# EAGLE board sensorboard final2 (EAGLE 9.3.0)
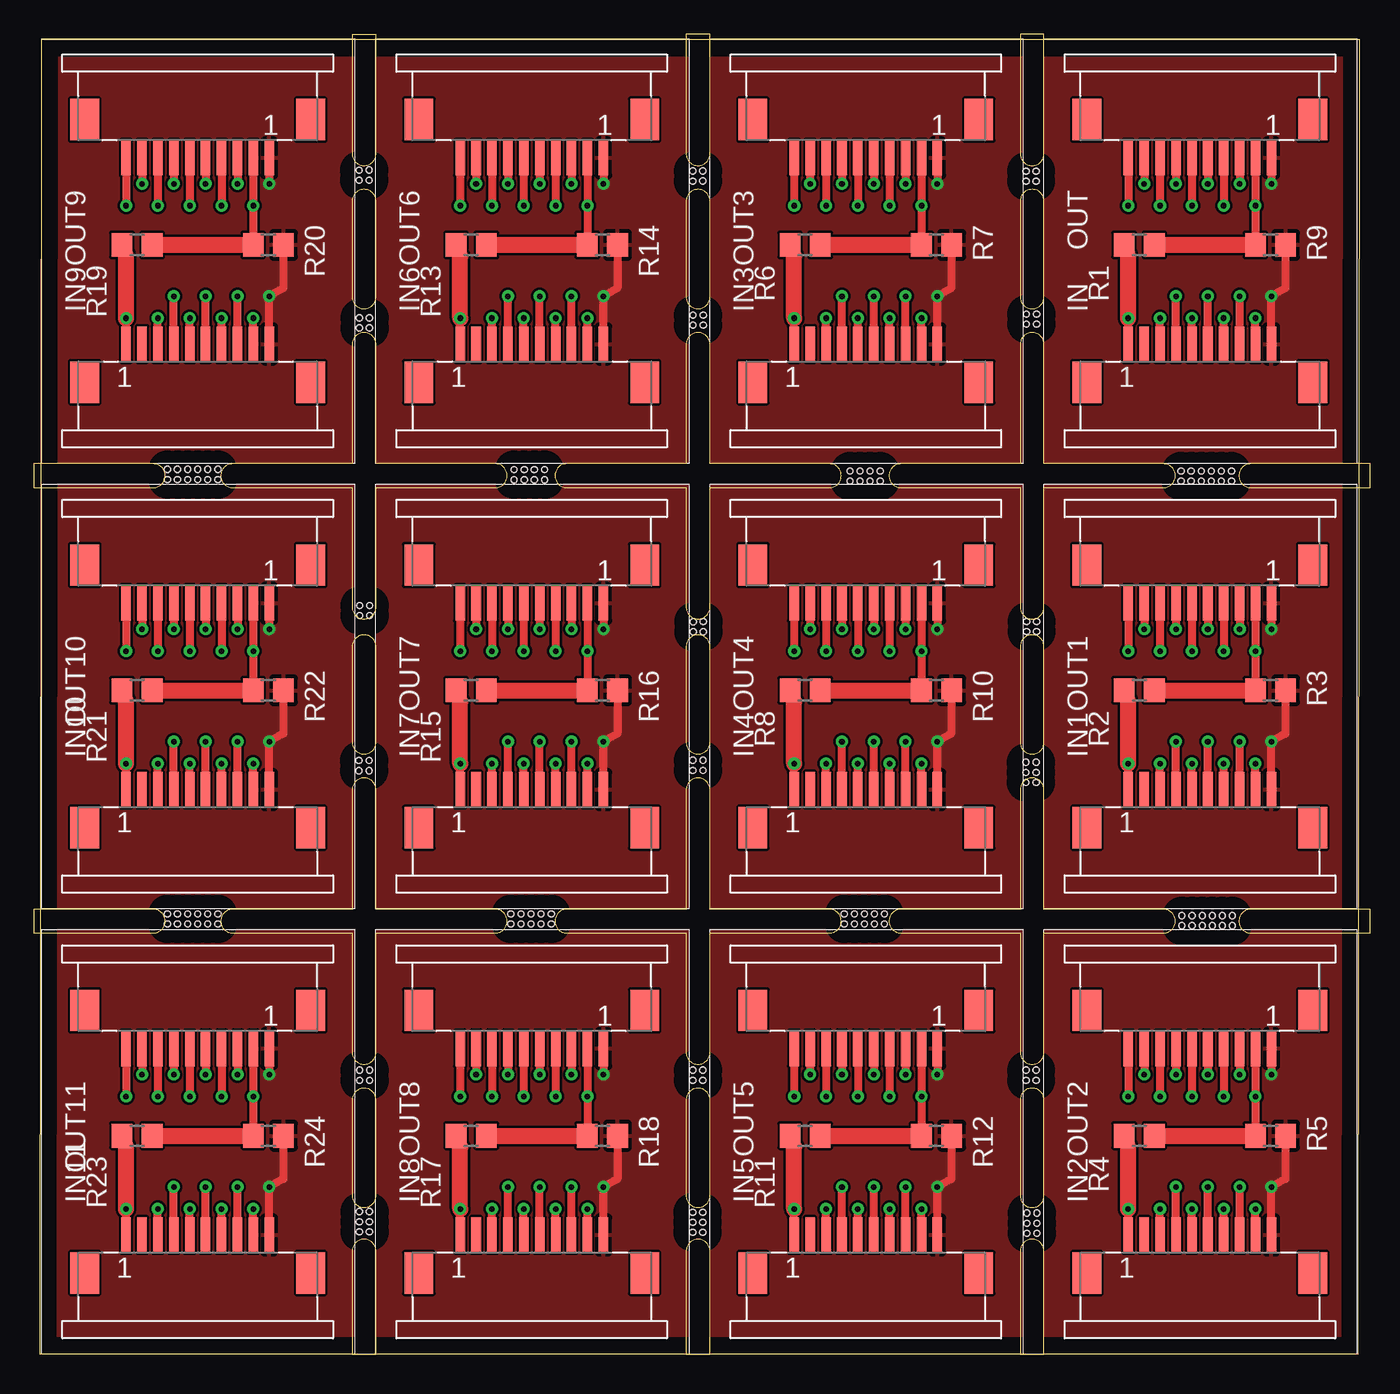
[diagram p0: board, top side]
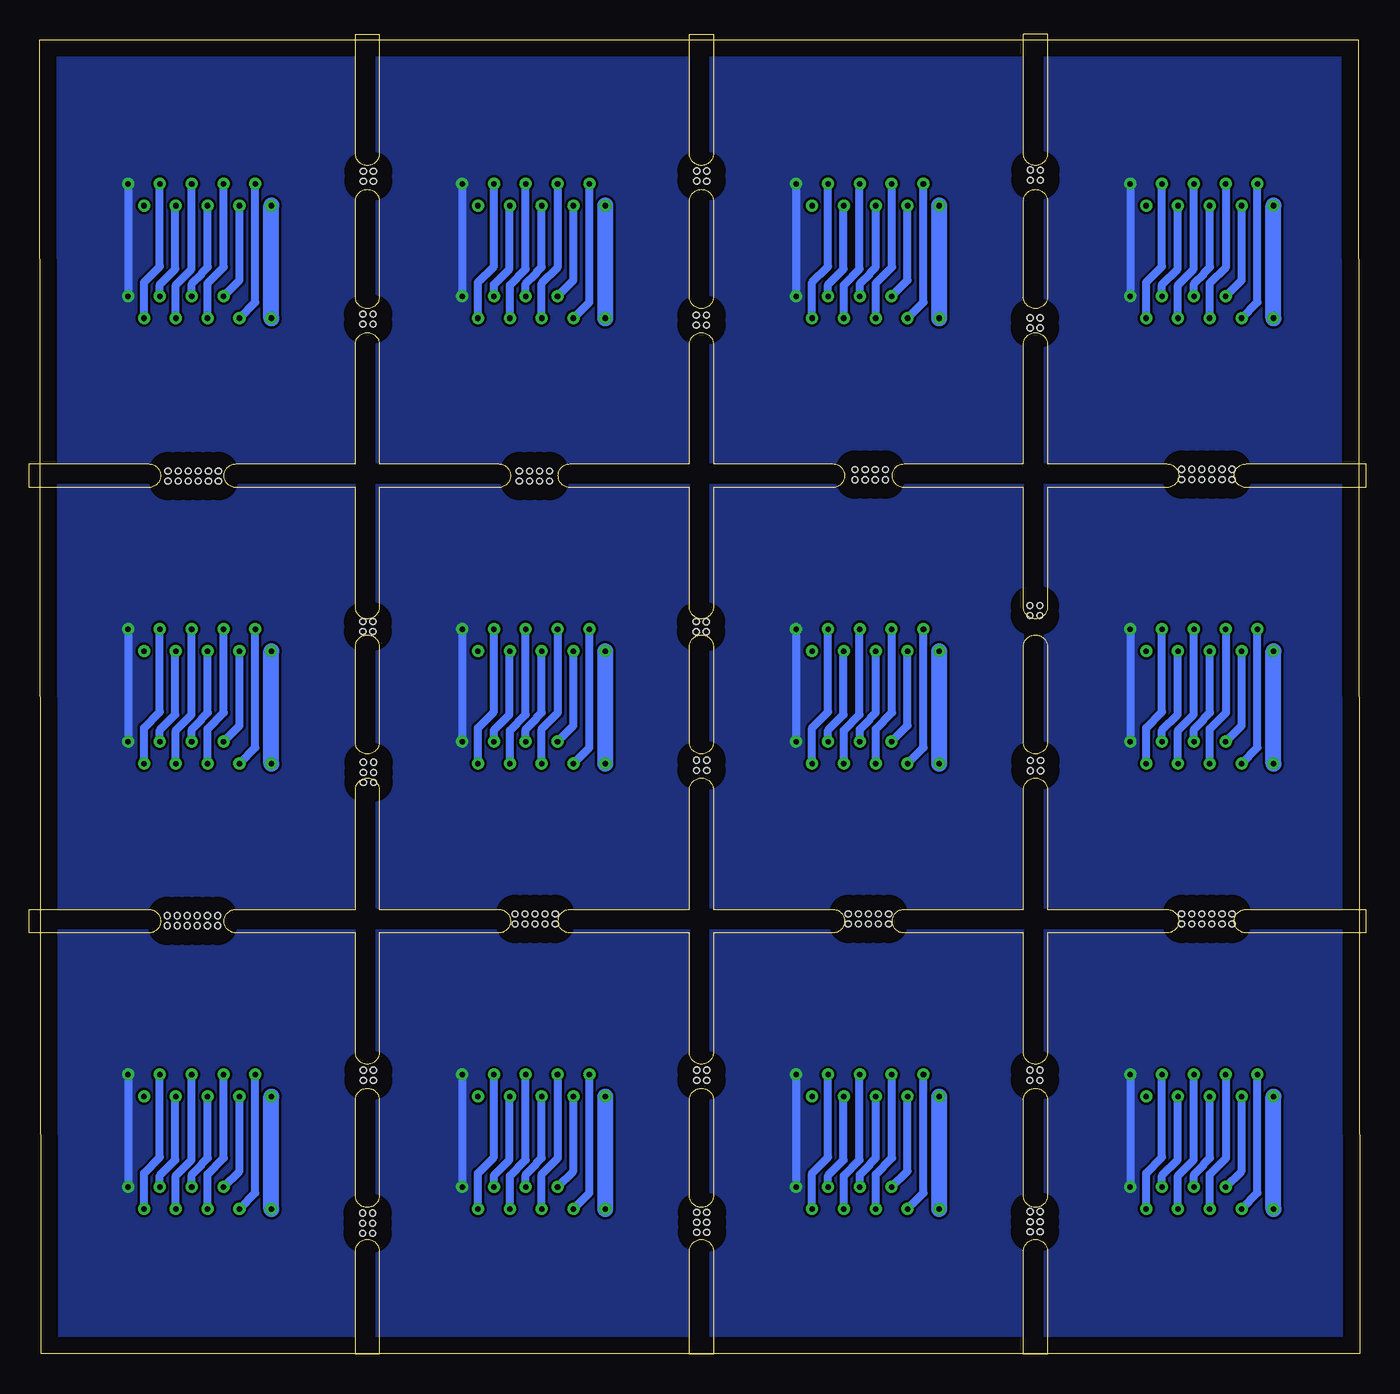
[diagram p1: board, bottom side, seen from below]

Size 82.98 x 82.61 mm. Coordinates in mm from the lower left corner, seen from the top.
Outline: 0,0 82.9,0 82.98,82.61 0.08,82.61 0,0
Copper layers (1*16): Top 0.035mm / dielectric 1.5mm / Bottom 0.035mm
Design rules "default": minimum track width 6mil, minimum drill 0.35mm, track to track 6mil, track to pad 6mil, pad to pad 6mil, via to via 6mil, smd to smd 6mil, copper to edge 40mil, drill to drill 6mil, minimum pad ring 10mil, minimum via ring 8mil, stop-mask expansion 4mil, vias tented up to drill 0mil, thermal gap 10mil
Holes 0.35 mm at 8.02,55.6 9.29,55.6 10.56,55.6 8.66,55.6 9.93,55.6 8.02,54.97 8.66,54.97 9.29,54.97 9.93,54.97 10.56,54.97 11.2,54.97 11.2,55.6 8.02,27.66 9.29,27.66 10.56,27.66 8.66,27.66 9.93,27.66 8.02,27.03 8.66,27.03 9.29,27.03 9.93,27.03 10.56,27.03 11.2,27.03 11.2,27.66 20.09,8.31 20.09,7.67 20.09,8.94 20.72,7.67 20.72,8.31 20.72,8.94 41.04,8.27 41.04,7.64 41.04,8.91 41.68,7.64 41.68,8.27 41.68,8.91 62.06,8.22 62.06,7.58 62.06,8.85 62.69,7.58 62.69,8.22 62.69,8.85 62.01,17.83 62.01,17.2 62.64,17.2 62.64,17.84 41.05,17.83 41.05,17.2 41.68,17.2 41.68,17.84 20.1,17.83 20.1,17.2 20.73,17.2 20.73,17.84 29.61,27.66 30.88,27.66 32.15,27.66 30.25,27.66 31.52,27.66 29.61,27.03 30.25,27.03 30.88,27.03 31.52,27.03 32.15,27.03 51.2,27.66 52.47,27.66 50.57,27.66 51.84,27.66 50.57,27.03 51.2,27.03 51.84,27.03 52.47,27.03 53.11,27.03 53.11,27.66 71.8,27.55 73.07,27.55 74.34,27.55 72.44,27.55 73.71,27.55 71.8,26.91 72.44,26.91 73.07,26.91 73.71,26.91 74.34,26.91 74.98,26.91 74.98,27.55 71.74,55.5 73.01,55.5 74.28,55.5 72.38,55.5 73.65,55.5 71.74,54.86 72.38,54.86 73.01,54.86 73.65,54.86 74.28,54.86 74.92,54.86 74.92,55.5 51.56,55.5 52.83,55.5 50.93,55.5 52.2,55.5 50.93,54.86 51.56,54.86 52.2,54.86 52.83,54.86 20.06,37.3 20.06,36.66 20.7,36.66 20.7,37.3 20.1,47.04 20.1,46.41 20.73,46.41 20.73,47.05 41.05,37.32 41.05,36.68 41.69,36.68 41.69,37.32 41.08,46.03 41.08,45.39 41.71,45.4 41.71,46.03 62,36.55 62,35.92 62,37.19 62.63,35.92 62.63,36.55 62.63,37.19 62.04,46.04 62.04,45.4 62.67,45.4 62.67,46.04 62.03,65.36 62.03,64.72 62.66,64.72 62.66,65.36 62.01,74.35 62.01,73.71 62.64,73.72 62.64,74.35 41.07,65.3 41.07,64.66 41.71,64.66 41.71,65.3 41.05,74.36 41.05,73.73 41.68,73.73 41.68,74.37 20.09,65.13 20.09,64.49 20.72,64.49 20.72,65.13 20.07,74.42 20.07,73.78 20.7,73.79 20.7,74.42 30.46,55.59 31.73,55.59 29.82,55.59 31.09,55.59 29.82,54.95 30.46,54.95 31.09,54.95 31.73,54.95
Milling: 151 lines

## Footprints (pad centres in the part's own frame; a part is rotated, then mirrored left to right if it is on the bottom)
68611014422 = smd 0.6 x 2.2: 1 -4.5,2.4; 2 -3.5,2.4; 3 -2.5,2.4; 4 -1.5,2.4; 5 -0.5,2.4; 6 0.5,2.4; 7 1.5,2.4; 8 2.5,2.4; 9 3.5,2.4; 10 4.5,2.4 | smd 1.8 x 2.6: Z1 -7.1,0; Z2 7.1,0
R0805 = smd 1.3 x 1.5: 1 -0.95,0; 2 0.95,0

## Placement (x,y rotation side)
IN  analog  [68611014422]  72.93,61.08 0 top
IN1  analog  [68611014422]  72.93,33.08 0 top
IN2  analog  [68611014422]  72.93,5.08 0 top
IN3  analog  [68611014422]  51.93,61.08 0 top
IN4  analog  [68611014422]  51.93,33.08 0 top
IN5  analog  [68611014422]  51.93,5.08 0 top
IN6  analog  [68611014422]  30.93,61.08 0 top
IN7  analog  [68611014422]  30.93,33.08 0 top
IN8  analog  [68611014422]  30.93,5.08 0 top
IN9  analog  [68611014422]  9.93,61.08 0 top
IN10  analog  [68611014422]  9.93,33.08 0 top
IN11  analog  [68611014422]  9.93,5.08 0 top
OUT  analog  [68611014422]  72.93,77.59 180 top
OUT1  analog  [68611014422]  72.93,49.59 180 top
OUT2  analog  [68611014422]  72.93,21.59 180 top
OUT3  analog  [68611014422]  51.93,77.59 180 top
OUT4  analog  [68611014422]  51.93,49.59 180 top
OUT5  analog  [68611014422]  51.93,21.59 180 top
OUT6  analog  [68611014422]  30.93,77.59 180 top
OUT7  analog  [68611014422]  30.93,49.59 180 top
OUT8  analog  [68611014422]  30.93,21.59 180 top
OUT9  analog  [68611014422]  9.93,77.59 180 top
OUT10  analog  [68611014422]  9.93,49.59 180 top
OUT11  analog  [68611014422]  9.93,21.59 180 top
R1  NTC  [R0805]  69.12,69.72 180 top
R2  NTC  [R0805]  69.12,41.72 180 top
R3  10K  [R0805]  77.37,41.72 180 top
R4  NTC  [R0805]  69.12,13.72 180 top
R5  10K  [R0805]  77.37,13.72 180 top
R6  NTC  [R0805]  48.12,69.72 180 top
R7  10K  [R0805]  56.37,69.72 180 top
R8  NTC  [R0805]  48.12,41.72 180 top
R9  10K  [R0805]  77.37,69.72 180 top
R10  10K  [R0805]  56.37,41.72 180 top
R11  NTC  [R0805]  48.12,13.72 180 top
R12  10K  [R0805]  56.37,13.72 180 top
R13  NTC  [R0805]  27.12,69.72 180 top
R14  10K  [R0805]  35.37,69.72 180 top
R15  NTC  [R0805]  27.12,41.72 180 top
R16  10K  [R0805]  35.37,41.72 180 top
R17  NTC  [R0805]  27.12,13.72 180 top
R18  10K  [R0805]  35.37,13.72 180 top
R19  NTC  [R0805]  6.12,69.72 180 top
R20  10K  [R0805]  14.37,69.72 180 top
R21  NTC  [R0805]  6.12,41.72 180 top
R22  10K  [R0805]  14.37,41.72 180 top
R23  NTC  [R0805]  6.12,13.72 180 top
R24  10K  [R0805]  14.37,13.72 180 top

## Library data of the parts
IN IN1-IN11 OUT OUT1-OUT11 = Wurth_Elektronik_Electromechanic_FPC_Connectors_&_Flat_Flexible_Cable_rev18c
R1-R24 = rcl; SPICEPREFIX: R

## Nets
+5V: IN.1 OUT.10 R1.2
+5V1: IN1.1 OUT1.10 R2.2
+5V2: IN2.1 OUT2.10 R4.2
+5V3: IN3.1 OUT3.10 R6.2
+5V4: IN4.1 OUT4.10 R8.2
+5V5: IN5.1 OUT5.10 R11.2
+5V6: IN6.1 OUT6.10 R13.2
+5V7: IN7.1 OUT7.10 R15.2
+5V8: IN8.1 OUT8.10 R17.2
+5V9: IN9.1 OUT9.10 R19.2
+5V10: IN10.1 OUT10.10 R21.2
+5V11: IN11.1 OUT11.10 R23.2
AD1: IN1.3 OUT1.9
AD2: IN.3 OUT.9
AD3: IN.4 OUT.8
AD4: IN.5 OUT.7
AD5: IN.6 OUT.6
AD6: IN.7 OUT.5
AD7: IN.8 OUT.4
AD8: IN.9 OUT.3
AD9: IN1.4 OUT1.8
AD10: IN1.5 OUT1.7
AD11: IN1.9 OUT1.3
AD12: IN1.8 OUT1.4
AD13: IN1.7 OUT1.5
AD14: IN1.6 OUT1.6
AD15: IN2.3 OUT2.9
AD16: IN2.4 OUT2.8
AD17: IN2.5 OUT2.7
AD18: IN2.9 OUT2.3
AD19: IN2.8 OUT2.4
AD20: IN2.7 OUT2.5
AD21: IN2.6 OUT2.6
AD22: IN3.3 OUT3.9
AD23: IN3.4 OUT3.8
AD24: IN3.5 OUT3.7
AD25: IN3.9 OUT3.3
AD26: IN3.8 OUT3.4
AD27: IN3.7 OUT3.5
AD28: IN3.6 OUT3.6
AD29: IN4.3 OUT4.9
AD30: IN4.4 OUT4.8
AD31: IN4.5 OUT4.7
AD32: IN4.9 OUT4.3
AD33: IN4.8 OUT4.4
AD34: IN4.7 OUT4.5
AD35: IN4.6 OUT4.6
AD36: IN5.3 OUT5.9
AD37: IN5.4 OUT5.8
AD38: IN5.5 OUT5.7
AD39: IN5.9 OUT5.3
AD40: IN5.8 OUT5.4
AD41: IN5.7 OUT5.5
AD42: IN5.6 OUT5.6
AD43: IN6.3 OUT6.9
AD44: IN6.4 OUT6.8
AD45: IN6.5 OUT6.7
AD46: IN6.9 OUT6.3
AD47: IN6.8 OUT6.4
AD48: IN6.7 OUT6.5
AD49: IN6.6 OUT6.6
AD50: IN7.3 OUT7.9
AD51: IN7.4 OUT7.8
AD52: IN7.5 OUT7.7
AD53: IN7.9 OUT7.3
AD54: IN7.8 OUT7.4
AD55: IN7.7 OUT7.5
AD56: IN7.6 OUT7.6
AD57: IN8.3 OUT8.9
AD58: IN8.4 OUT8.8
AD59: IN8.5 OUT8.7
AD60: IN8.9 OUT8.3
AD61: IN8.8 OUT8.4
AD62: IN8.7 OUT8.5
AD63: IN8.6 OUT8.6
AD64: IN9.3 OUT9.9
AD65: IN9.4 OUT9.8
AD66: IN9.5 OUT9.7
AD67: IN9.9 OUT9.3
AD68: IN9.8 OUT9.4
AD69: IN9.7 OUT9.5
AD70: IN9.6 OUT9.6
AD71: IN10.3 OUT10.9
AD72: IN10.4 OUT10.8
AD73: IN10.5 OUT10.7
AD74: IN10.9 OUT10.3
AD75: IN10.8 OUT10.4
AD76: IN10.7 OUT10.5
AD77: IN10.6 OUT10.6
AD78: IN11.3 OUT11.9
AD79: IN11.4 OUT11.8
AD80: IN11.5 OUT11.7
AD81: IN11.9 OUT11.3
AD82: IN11.8 OUT11.4
AD83: IN11.7 OUT11.5
AD84: IN11.6 OUT11.6
ADB: OUT.2 R1.1 R9.2
ADB1: OUT1.2 R2.1 R3.2
ADB2: OUT2.2 R4.1 R5.2
ADB3: OUT3.2 R6.1 R7.2
ADB4: OUT4.2 R8.1 R10.2
ADB5: OUT5.2 R11.1 R12.2
ADB6: OUT6.2 R13.1 R14.2
ADB7: OUT7.2 R15.1 R16.2
ADB8: OUT8.2 R17.1 R18.2
ADB9: OUT9.2 R19.1 R20.2
ADB10: OUT10.2 R21.1 R22.2
ADB11: OUT11.2 R23.1 R24.2
AGND: IN.10 OUT.1 R9.1
AGND1: IN1.10 OUT1.1 R3.1
AGND2: IN2.10 OUT2.1 R5.1
AGND3: IN3.10 OUT3.1 R7.1
AGND4: IN4.10 OUT4.1 R10.1
AGND5: IN5.10 OUT5.1 R12.1
AGND6: IN6.10 OUT6.1 R14.1
AGND7: IN7.10 OUT7.1 R16.1
AGND8: IN8.10 OUT8.1 R18.1
AGND9: IN9.10 OUT9.1 R20.1
AGND10: IN10.10 OUT10.1 R22.1
AGND11: IN11.10 OUT11.1 R24.1

## Tracks (layer width: path | path; a pad name or v marks a point on that pad's centre or on a via)
+5V  (via drill 0.35)
  Top 0.508: IN.1 v68.43,65.11 | OUT.10 v68.43,72.18
  Top 1.016: v68.43,65.11 68.43,69.01 R1.2
  Bottom 1.016: v68.43,65.11 v68.43,72.18
+5V1  (via drill 0.35)
  Top 0.508: IN1.1 v68.43,37.11 | OUT1.10 v68.43,44.18
  Top 1.016: v68.43,37.11 68.43,41.01 R2.2
  Bottom 1.016: v68.43,37.11 v68.43,44.18
+5V2  (via drill 0.35)
  Top 0.508: IN2.1 v68.43,9.11 | OUT2.10 v68.43,16.18
  Top 1.016: v68.43,9.11 68.43,13.01 R4.2
  Bottom 1.016: v68.43,9.11 v68.43,16.18
+5V3  (via drill 0.35)
  Top 0.508: IN3.1 v47.43,65.11 | OUT3.10 v47.43,72.18
  Top 1.016: v47.43,65.11 47.43,69.01 R6.2
  Bottom 1.016: v47.43,65.11 v47.43,72.18
+5V4  (via drill 0.35)
  Top 0.508: IN4.1 v47.43,37.11 | OUT4.10 v47.43,44.18
  Top 1.016: v47.43,37.11 47.43,41.01 R8.2
  Bottom 1.016: v47.43,37.11 v47.43,44.18
+5V5  (via drill 0.35)
  Top 0.508: IN5.1 v47.43,9.11 | OUT5.10 v47.43,16.18
  Top 1.016: v47.43,9.11 47.43,13.01 R11.2
  Bottom 1.016: v47.43,9.11 v47.43,16.18
+5V6  (via drill 0.35)
  Top 0.508: IN6.1 v26.43,65.11 | OUT6.10 v26.43,72.18
  Top 1.016: v26.43,65.11 26.43,69.01 R13.2
  Bottom 1.016: v26.43,65.11 v26.43,72.18
+5V7  (via drill 0.35)
  Top 0.508: IN7.1 v26.43,37.11 | OUT7.10 v26.43,44.18
  Top 1.016: v26.43,37.11 26.43,41.01 R15.2
  Bottom 1.016: v26.43,37.11 v26.43,44.18
+5V8  (via drill 0.35)
  Top 0.508: IN8.1 v26.43,9.11 | OUT8.10 v26.43,16.18
  Top 1.016: v26.43,9.11 26.43,13.01 R17.2
  Bottom 1.016: v26.43,9.11 v26.43,16.18
+5V9  (via drill 0.35)
  Top 0.508: IN9.1 v5.43,65.11 | OUT9.10 v5.43,72.18
  Top 1.016: v5.43,65.11 5.43,69.01 R19.2
  Bottom 1.016: v5.43,65.11 v5.43,72.18
+5V10  (via drill 0.35)
  Top 0.508: IN10.1 v5.43,37.11 | OUT10.10 v5.43,44.18
  Top 1.016: v5.43,37.11 5.43,41.01 R21.2
  Bottom 1.016: v5.43,37.11 v5.43,44.18
+5V11  (via drill 0.35)
  Top 0.508: IN11.1 v5.43,9.11 | OUT11.10 v5.43,16.18
  Top 1.016: v5.43,9.11 5.43,13.01 R23.2
  Bottom 1.016: v5.43,9.11 v5.43,16.18
AD1  (via drill 0.35)
  Top 0.508: IN1.3 v70.43,37.11 | OUT1.9 v69.43,45.56
  Bottom 0.508: v70.43,37.11 69.43,38.11 v69.43,45.56
AD2  (via drill 0.35)
  Top 0.508: IN.3 v70.43,65.11 | OUT.9 v69.43,73.56
  Bottom 0.508: v70.43,65.11 69.43,66.11 v69.43,73.56
AD3  (via drill 0.35)
  Top 0.508: IN.4 v71.43,66.49 | OUT.8 v70.43,72.18
  Bottom 0.508: v71.43,66.49 70.43,67.49 v70.43,72.18
AD4  (via drill 0.35)
  Top 0.508: IN.5 v72.43,65.11 | OUT.7 v71.43,73.56
  Bottom 0.508: v72.43,65.11 72.43,67.29 71.4,68.32 71.4,73.54 v71.43,73.56
AD5  (via drill 0.35)
  Top 0.508: IN.6 v73.43,66.49 | OUT.6 v72.43,72.18
  Bottom 0.508: v73.43,66.49 73.43,67.27 72.77,67.92 72.77,67.96 72.42,68.32 72.42,72.17 v72.43,72.18
AD6  (via drill 0.35)
  Top 0.508: IN.7 v74.43,65.11 | OUT.5 v73.43,73.56
  Bottom 0.508: v74.43,65.11 74.43,67.2 73.43,68.19 73.43,73.55 v73.43,73.56
AD7  (via drill 0.35)
  Top 0.508: IN.8 v75.43,66.49 | OUT.4 v74.43,72.18
  Bottom 0.508: v75.43,66.49 75.43,67.22 74.45,68.19 74.45,72.16 v74.43,72.18
AD8  (via drill 0.35)
  Top 0.508: IN.9 v76.43,65.11 | OUT.3 v75.43,73.56
  Bottom 0.508: v76.43,65.11 76.43,67.36 75.43,68.36 v75.43,73.56
AD9  (via drill 0.35)
  Top 0.508: IN1.4 v71.43,38.49 | OUT1.8 v70.43,44.18
  Bottom 0.508: v71.43,38.49 70.43,39.49 v70.43,44.18
AD10  (via drill 0.35)
  Top 0.508: IN1.5 v72.43,37.11 | OUT1.7 v71.43,45.56
  Bottom 0.508: v72.43,37.11 72.43,39.29 71.4,40.32 71.4,45.54 v71.43,45.56
AD11  (via drill 0.35)
  Top 0.508: IN1.9 v76.43,37.11 | OUT1.3 v75.43,45.56
  Bottom 0.508: v76.43,37.11 76.43,39.36 75.43,40.36 v75.43,45.56
AD12  (via drill 0.35)
  Top 0.508: IN1.8 v75.43,38.49 | OUT1.4 v74.43,44.18
  Bottom 0.508: v75.43,38.49 75.43,39.22 74.45,40.19 74.45,44.16 v74.43,44.18
AD13  (via drill 0.35)
  Top 0.508: IN1.7 v74.43,37.11 | OUT1.5 v73.43,45.56
  Bottom 0.508: v74.43,37.11 74.43,39.2 73.43,40.19 73.43,45.55 v73.43,45.56
AD14  (via drill 0.35)
  Top 0.508: IN1.6 v73.43,38.49 | OUT1.6 v72.43,44.18
  Bottom 0.508: v73.43,38.49 73.43,39.27 72.77,39.92 72.77,39.96 72.42,40.32 v72.42,44.17 v72.43,44.18
AD15  (via drill 0.35)
  Top 0.508: IN2.3 v70.43,9.11 | OUT2.9 v69.43,17.56
  Bottom 0.508: v70.43,9.11 69.43,10.11 v69.43,17.56
AD16  (via drill 0.35)
  Top 0.508: IN2.4 v71.43,10.49 | OUT2.8 v70.43,16.18
  Bottom 0.508: v71.43,10.49 70.43,11.49 v70.43,16.18
AD17  (via drill 0.35)
  Top 0.508: IN2.5 v72.43,9.11 | OUT2.7 v71.43,17.56
  Bottom 0.508: v72.43,9.11 72.43,11.29 71.4,12.32 71.4,17.54 v71.43,17.56
AD18  (via drill 0.35)
  Top 0.508: IN2.9 v76.43,9.11 | OUT2.3 v75.43,17.56
  Bottom 0.508: v76.43,9.11 76.43,11.36 75.43,12.36 v75.43,17.56
AD19  (via drill 0.35)
  Top 0.508: IN2.8 v75.43,10.49 | OUT2.4 v74.43,16.18
  Bottom 0.508: v75.43,10.49 75.43,11.22 74.45,12.19 74.45,16.16 v74.43,16.18
AD20  (via drill 0.35)
  Top 0.508: IN2.7 v74.43,9.11 | OUT2.5 v73.43,17.56
  Bottom 0.508: v74.43,9.11 74.43,11.2 73.43,12.19 73.43,17.55 v73.43,17.56
AD21  (via drill 0.35)
  Top 0.508: IN2.6 v73.43,10.49 | OUT2.6 v72.43,16.18
  Bottom 0.508: v73.43,10.49 73.43,11.27 72.77,11.92 72.77,11.96 72.42,12.32 v72.42,16.17 v72.43,16.18
AD22  (via drill 0.35)
  Top 0.508: IN3.3 v49.43,65.11 | OUT3.9 v48.43,73.56
  Bottom 0.508: v49.43,65.11 48.43,66.11 v48.43,73.56
AD23  (via drill 0.35)
  Top 0.508: IN3.4 v50.43,66.49 | OUT3.8 v49.43,72.18
  Bottom 0.508: v50.43,66.49 49.43,67.49 v49.43,72.18
AD24  (via drill 0.35)
  Top 0.508: IN3.5 v51.43,65.11 | OUT3.7 v50.43,73.56
  Bottom 0.508: v51.43,65.11 51.43,67.29 50.4,68.32 50.4,73.54 v50.43,73.56
AD25  (via drill 0.35)
  Top 0.508: IN3.9 v55.43,65.11 | OUT3.3 v54.43,73.56
  Bottom 0.508: v55.43,65.11 55.43,67.36 54.43,68.36 v54.43,73.56
AD26  (via drill 0.35)
  Top 0.508: IN3.8 v54.43,66.49 | OUT3.4 v53.43,72.18
  Bottom 0.508: v54.43,66.49 54.43,67.22 53.45,68.19 53.45,72.16 v53.43,72.18
AD27  (via drill 0.35)
  Top 0.508: IN3.7 v53.43,65.11 | OUT3.5 v52.43,73.56
  Bottom 0.508: v53.43,65.11 53.43,67.2 52.43,68.19 52.43,73.55 v52.43,73.56
AD28  (via drill 0.35)
  Top 0.508: IN3.6 v52.43,66.49 | OUT3.6 v51.43,72.18
  Bottom 0.508: v52.43,66.49 52.43,67.27 51.77,67.92 51.77,67.96 51.42,68.32 51.42,72.17 v51.43,72.18
AD29  (via drill 0.35)
  Top 0.508: IN4.3 v49.43,37.11 | OUT4.9 v48.43,45.56
  Bottom 0.508: v49.43,37.11 48.43,38.11 v48.43,45.56
AD30  (via drill 0.35)
  Top 0.508: IN4.4 v50.43,38.49 | OUT4.8 v49.43,44.18
  Bottom 0.508: v50.43,38.49 49.43,39.49 v49.43,44.18
AD31  (via drill 0.35)
  Top 0.508: IN4.5 v51.43,37.11 | OUT4.7 v50.43,45.56
  Bottom 0.508: v51.43,37.11 51.43,39.29 50.4,40.32 50.4,45.54 v50.43,45.56
AD32  (via drill 0.35)
  Top 0.508: IN4.9 v55.43,37.11 | OUT4.3 v54.43,45.56
  Bottom 0.508: v55.43,37.11 55.43,39.36 54.43,40.36 v54.43,45.56
AD33  (via drill 0.35)
  Top 0.508: IN4.8 v54.43,38.49 | OUT4.4 v53.43,44.18
  Bottom 0.508: v54.43,38.49 54.43,39.22 53.45,40.19 53.45,44.16 v53.43,44.18
AD34  (via drill 0.35)
  Top 0.508: IN4.7 v53.43,37.11 | OUT4.5 v52.43,45.56
  Bottom 0.508: v53.43,37.11 53.43,39.2 52.43,40.19 52.43,45.55 v52.43,45.56
AD35  (via drill 0.35)
  Top 0.508: IN4.6 v52.43,38.49 | OUT4.6 v51.43,44.18
  Bottom 0.508: v52.43,38.49 52.43,39.27 51.77,39.92 51.77,39.96 51.42,40.32 v51.42,44.17 v51.43,44.18
AD36  (via drill 0.35)
  Top 0.508: IN5.3 v49.43,9.11 | OUT5.9 v48.43,17.56
  Bottom 0.508: v49.43,9.11 48.43,10.11 v48.43,17.56
AD37  (via drill 0.35)
  Top 0.508: IN5.4 v50.43,10.49 | OUT5.8 v49.43,16.18
  Bottom 0.508: v50.43,10.49 49.43,11.49 v49.43,16.18
AD38  (via drill 0.35)
  Top 0.508: IN5.5 v51.43,9.11 | OUT5.7 v50.43,17.56
  Bottom 0.508: v51.43,9.11 51.43,11.29 50.4,12.32 50.4,17.54 v50.43,17.56
AD39  (via drill 0.35)
  Top 0.508: IN5.9 v55.43,9.11 | OUT5.3 v54.43,17.56
  Bottom 0.508: v55.43,9.11 55.43,11.36 54.43,12.36 v54.43,17.56
AD40  (via drill 0.35)
  Top 0.508: IN5.8 v54.43,10.49 | OUT5.4 v53.43,16.18
  Bottom 0.508: v54.43,10.49 54.43,11.22 53.45,12.19 53.45,16.16 v53.43,16.18
AD41  (via drill 0.35)
  Top 0.508: IN5.7 v53.43,9.11 | OUT5.5 v52.43,17.56
  Bottom 0.508: v53.43,9.11 53.43,11.2 52.43,12.19 52.43,17.55 v52.43,17.56
AD42  (via drill 0.35)
  Top 0.508: IN5.6 v52.43,10.49 | OUT5.6 v51.43,16.18
  Bottom 0.508: v52.43,10.49 52.43,11.27 51.77,11.92 51.77,11.96 51.42,12.32 v51.42,16.17 v51.43,16.18
AD43  (via drill 0.35)
  Top 0.508: IN6.3 v28.43,65.11 | OUT6.9 v27.43,73.56
  Bottom 0.508: v28.43,65.11 27.43,66.11 v27.43,73.56
AD44  (via drill 0.35)
  Top 0.508: IN6.4 v29.43,66.49 | OUT6.8 v28.43,72.18
  Bottom 0.508: v29.43,66.49 28.43,67.49 v28.43,72.18
AD45  (via drill 0.35)
  Top 0.508: IN6.5 v30.43,65.11 | OUT6.7 v29.43,73.56
  Bottom 0.508: v30.43,65.11 30.43,67.29 29.4,68.32 29.4,73.54 v29.43,73.56
AD46  (via drill 0.35)
  Top 0.508: IN6.9 v34.43,65.11 | OUT6.3 v33.43,73.56
  Bottom 0.508: v34.43,65.11 34.43,67.36 33.43,68.36 v33.43,73.56
AD47  (via drill 0.35)
  Top 0.508: IN6.8 v33.43,66.49 | OUT6.4 v32.43,72.18
  Bottom 0.508: v33.43,66.49 33.43,67.22 32.45,68.19 32.45,72.16 v32.43,72.18
AD48  (via drill 0.35)
  Top 0.508: IN6.7 v32.43,65.11 | OUT6.5 v31.43,73.56
  Bottom 0.508: v32.43,65.11 32.43,67.2 31.43,68.19 31.43,73.55 v31.43,73.56
AD49  (via drill 0.35)
  Top 0.508: IN6.6 v31.43,66.49 | OUT6.6 v30.43,72.18
  Bottom 0.508: v31.43,66.49 31.43,67.27 30.77,67.92 30.77,67.96 30.42,68.32 30.42,72.17 v30.43,72.18
AD50  (via drill 0.35)
  Top 0.508: IN7.3 v28.43,37.11 | OUT7.9 v27.43,45.56
  Bottom 0.508: v28.43,37.11 27.43,38.11 v27.43,45.56
AD51  (via drill 0.35)
  Top 0.508: IN7.4 v29.43,38.49 | OUT7.8 v28.43,44.18
  Bottom 0.508: v29.43,38.49 28.43,39.49 v28.43,44.18
AD52  (via drill 0.35)
  Top 0.508: IN7.5 v30.43,37.11 | OUT7.7 v29.43,45.56
  Bottom 0.508: v30.43,37.11 30.43,39.29 29.4,40.32 29.4,45.54 v29.43,45.56
AD53  (via drill 0.35)
  Top 0.508: IN7.9 v34.43,37.11 | OUT7.3 v33.43,45.56
  Bottom 0.508: v34.43,37.11 34.43,39.36 33.43,40.36 v33.43,45.56
AD54  (via drill 0.35)
  Top 0.508: IN7.8 v33.43,38.49 | OUT7.4 v32.43,44.18
  Bottom 0.508: v33.43,38.49 33.43,39.22 32.45,40.19 32.45,44.16 v32.43,44.18
AD55  (via drill 0.35)
  Top 0.508: IN7.7 v32.43,37.11 | OUT7.5 v31.43,45.56
  Bottom 0.508: v32.43,37.11 32.43,39.2 31.43,40.19 31.43,45.55 v31.43,45.56
AD56  (via drill 0.35)
  Top 0.508: IN7.6 v31.43,38.49 | OUT7.6 v30.43,44.18
  Bottom 0.508: v31.43,38.49 31.43,39.27 30.77,39.92 30.77,39.96 30.42,40.32 v30.42,44.17 v30.43,44.18
AD57  (via drill 0.35)
  Top 0.508: IN8.3 v28.43,9.11 | OUT8.9 v27.43,17.56
  Bottom 0.508: v28.43,9.11 27.43,10.11 v27.43,17.56
AD58  (via drill 0.35)
  Top 0.508: IN8.4 v29.43,10.49 | OUT8.8 v28.43,16.18
  Bottom 0.508: v29.43,10.49 28.43,11.49 v28.43,16.18
AD59  (via drill 0.35)
  Top 0.508: IN8.5 v30.43,9.11 | OUT8.7 v29.43,17.56
  Bottom 0.508: v30.43,9.11 30.43,11.29 29.4,12.32 29.4,17.54 v29.43,17.56
AD60  (via drill 0.35)
  Top 0.508: IN8.9 v34.43,9.11 | OUT8.3 v33.43,17.56
  Bottom 0.508: v34.43,9.11 34.43,11.36 33.43,12.36 v33.43,17.56
AD61  (via drill 0.35)
  Top 0.508: IN8.8 v33.43,10.49 | OUT8.4 v32.43,16.18
  Bottom 0.508: v33.43,10.49 33.43,11.22 32.45,12.19 32.45,16.16 v32.43,16.18
AD62  (via drill 0.35)
  Top 0.508: IN8.7 v32.43,9.11 | OUT8.5 v31.43,17.56
  Bottom 0.508: v32.43,9.11 32.43,11.2 31.43,12.19 31.43,17.55 v31.43,17.56
AD63  (via drill 0.35)
  Top 0.508: IN8.6 v31.43,10.49 | OUT8.6 v30.43,16.18
  Bottom 0.508: v31.43,10.49 31.43,11.27 30.77,11.92 30.77,11.96 30.42,12.32 v30.42,16.17 v30.43,16.18
AD64  (via drill 0.35)
  Top 0.508: IN9.3 v7.43,65.11 | OUT9.9 v6.43,73.56
  Bottom 0.508: v7.43,65.11 6.43,66.11 v6.43,73.56
AD65  (via drill 0.35)
  Top 0.508: IN9.4 v8.43,66.49 | OUT9.8 v7.43,72.18
  Bottom 0.508: v8.43,66.49 7.43,67.49 v7.43,72.18
AD66  (via drill 0.35)
  Top 0.508: IN9.5 v9.43,65.11 | OUT9.7 v8.43,73.56
  Bottom 0.508: v9.43,65.11 9.43,67.29 8.4,68.32 8.4,73.54 v8.43,73.56
AD67  (via drill 0.35)
  Top 0.508: IN9.9 v13.43,65.11 | OUT9.3 v12.43,73.56
  Bottom 0.508: v13.43,65.11 13.43,67.36 12.43,68.36 v12.43,73.56
AD68  (via drill 0.35)
  Top 0.508: IN9.8 v12.43,66.49 | OUT9.4 v11.43,72.18
  Bottom 0.508: v12.43,66.49 12.43,67.22 11.45,68.19 11.45,72.16 v11.43,72.18
AD69  (via drill 0.35)
  Top 0.508: IN9.7 v11.43,65.11 | OUT9.5 v10.43,73.56
  Bottom 0.508: v11.43,65.11 11.43,67.2 10.43,68.19 10.43,73.55 v10.43,73.56
AD70  (via drill 0.35)
  Top 0.508: IN9.6 v10.43,66.49 | OUT9.6 v9.43,72.18
  Bottom 0.508: v10.43,66.49 10.43,67.27 9.77,67.92 9.77,67.96 9.42,68.32 9.42,72.17 v9.43,72.18
AD71  (via drill 0.35)
  Top 0.508: IN10.3 v7.43,37.11 | OUT10.9 v6.43,45.56
  Bottom 0.508: v7.43,37.11 6.43,38.11 v6.43,45.56
AD72  (via drill 0.35)
  Top 0.508: IN10.4 v8.43,38.49 | OUT10.8 v7.43,44.18
  Bottom 0.508: v8.43,38.49 7.43,39.49 v7.43,44.18
AD73  (via drill 0.35)
  Top 0.508: IN10.5 v9.43,37.11 | OUT10.7 v8.43,45.56
  Bottom 0.508: v9.43,37.11 9.43,39.29 8.4,40.32 8.4,45.54 v8.43,45.56
AD74  (via drill 0.35)
  Top 0.508: IN10.9 v13.43,37.11 | OUT10.3 v12.43,45.56
  Bottom 0.508: v13.43,37.11 13.43,39.36 12.43,40.36 v12.43,45.56
AD75  (via drill 0.35)
  Top 0.508: IN10.8 v12.43,38.49 | OUT10.4 v11.43,44.18
  Bottom 0.508: v12.43,38.49 12.43,39.22 11.45,40.19 11.45,44.16 v11.43,44.18
AD76  (via drill 0.35)
  Top 0.508: IN10.7 v11.43,37.11 | OUT10.5 v10.43,45.56
  Bottom 0.508: v11.43,37.11 11.43,39.2 10.43,40.19 10.43,45.55 v10.43,45.56
AD77  (via drill 0.35)
  Top 0.508: IN10.6 v10.43,38.49 | OUT10.6 v9.43,44.18
  Bottom 0.508: v10.43,38.49 10.43,39.27 9.77,39.92 9.77,39.96 9.42,40.32 v9.42,44.17 v9.43,44.18
AD78  (via drill 0.35)
  Top 0.508: IN11.3 v7.43,9.11 | OUT11.9 v6.43,17.56
  Bottom 0.508: v7.43,9.11 6.43,10.11 v6.43,17.56
AD79  (via drill 0.35)
  Top 0.508: IN11.4 v8.43,10.49 | OUT11.8 v7.43,16.18
  Bottom 0.508: v8.43,10.49 7.43,11.49 v7.43,16.18
AD80  (via drill 0.35)
  Top 0.508: IN11.5 v9.43,9.11 | OUT11.7 v8.43,17.56
  Bottom 0.508: v9.43,9.11 9.43,11.29 8.4,12.32 8.4,17.54 v8.43,17.56
AD81  (via drill 0.35)
  Top 0.508: IN11.9 v13.43,9.11 | OUT11.3 v12.43,17.56
  Bottom 0.508: v13.43,9.11 13.43,11.36 12.43,12.36 v12.43,17.56
AD82  (via drill 0.35)
  Top 0.508: IN11.8 v12.43,10.49 | OUT11.4 v11.43,16.18
  Bottom 0.508: v12.43,10.49 12.43,11.22 11.45,12.19 11.45,16.16 v11.43,16.18
AD83  (via drill 0.35)
  Top 0.508: IN11.7 v11.43,9.11 | OUT11.5 v10.43,17.56
  Bottom 0.508: v11.43,9.11 11.43,11.2 10.43,12.19 10.43,17.55 v10.43,17.56
AD84  (via drill 0.35)
  Top 0.508: IN11.6 v10.43,10.49 | OUT11.6 v9.43,16.18
  Bottom 0.508: v10.43,10.49 10.43,11.27 9.77,11.92 9.77,11.96 9.42,12.32 v9.42,16.17 v9.43,16.18
ADB  (via drill 0.35)
  Top 0.508: OUT.2 v76.43,72.18 R9.2
  Top 1.016: R1.1 R9.2
ADB1  (via drill 0.35)
  Top 0.508: OUT1.2 v76.43,44.18 R3.2
  Top 1.016: R2.1 R3.2
ADB2  (via drill 0.35)
  Top 0.508: OUT2.2 v76.43,16.18 R5.2
  Top 1.016: R4.1 R5.2
ADB3  (via drill 0.35)
  Top 0.508: OUT3.2 v55.43,72.18 R7.2
  Top 1.016: R6.1 R7.2
ADB4  (via drill 0.35)
  Top 0.508: OUT4.2 v55.43,44.18 R10.2
  Top 1.016: R8.1 R10.2
ADB5  (via drill 0.35)
  Top 0.508: OUT5.2 v55.43,16.18 R12.2
  Top 1.016: R11.1 R12.2
ADB6  (via drill 0.35)
  Top 0.508: OUT6.2 v34.43,72.18 R14.2
  Top 1.016: R13.1 R14.2
ADB7  (via drill 0.35)
  Top 0.508: OUT7.2 v34.43,44.18 R16.2
  Top 1.016: R15.1 R16.2
ADB8  (via drill 0.35)
  Top 0.508: OUT8.2 v34.43,16.18 R18.2
  Top 1.016: R17.1 R18.2
ADB9  (via drill 0.35)
  Top 0.508: OUT9.2 v13.43,72.18 R20.2
  Top 1.016: R19.1 R20.2
ADB10  (via drill 0.35)
  Top 0.508: OUT10.2 v13.43,44.18 R22.2
  Top 1.016: R21.1 R22.2
ADB11  (via drill 0.35)
  Top 0.508: OUT11.2 v13.43,16.18 R24.2
  Top 1.016: R23.1 R24.2
AGND  (via drill 0.35)
  Top 0.508: IN.10 v77.43,66.49 78.31,67 78.31,69.71 R9.1 | OUT.1 v77.43,73.56
  Bottom 0.508: v77.43,73.56 v77.43,66.49
  pour Top: 63.15,56 82.83,56 82.83,82.67 63.15,82.67
  pour Bottom: 63.15,56 82.83,56 82.83,82.67 63.15,82.67
AGND1  (via drill 0.35)
  Top 0.508: IN1.10 v77.43,38.49 78.31,39 78.31,41.71 R3.1 | OUT1.1 v77.43,45.56
  Bottom 0.508: v77.43,45.56 v77.43,38.49
  pour Top: 63.15,28 82.83,28 82.83,54.67 63.15,54.67
  pour Bottom: 63.15,28 82.83,28 82.83,54.67 63.15,54.67
AGND2  (via drill 0.35)
  Top 0.508: IN2.10 v77.43,10.49 78.31,11 78.31,13.71 R5.1 | OUT2.1 v77.43,17.56
  Bottom 0.508: v77.43,17.56 v77.43,10.49
  pour Top: 63.15,0 82.83,0 82.83,26.67 63.15,26.67
  pour Bottom: 63.15,0 82.83,0 82.83,26.67 63.15,26.67
AGND3  (via drill 0.35)
  Top 0.508: IN3.10 v56.43,66.49 57.31,67 57.31,69.71 R7.1 | OUT3.1 v56.43,73.56
  Bottom 0.508: v56.43,73.56 v56.43,66.49
  pour Top: 42.15,56 61.83,56 61.83,82.67 42.15,82.67
  pour Bottom: 42.15,56 61.83,56 61.83,82.67 42.15,82.67
AGND4  (via drill 0.35)
  Top 0.508: IN4.10 v56.43,38.49 57.31,39 57.31,41.71 R10.1 | OUT4.1 v56.43,45.56
  Bottom 0.508: v56.43,45.56 v56.43,38.49
  pour Top: 42.15,28 61.83,28 61.83,54.67 42.15,54.67
  pour Bottom: 42.15,28 61.83,28 61.83,54.67 42.15,54.67
AGND5  (via drill 0.35)
  Top 0.508: IN5.10 v56.43,10.49 57.31,11 57.31,13.71 R12.1 | OUT5.1 v56.43,17.56
  Bottom 0.508: v56.43,17.56 v56.43,10.49
  pour Top: 42.15,0 61.83,0 61.83,26.67 42.15,26.67
  pour Bottom: 42.15,0 61.83,0 61.83,26.67 42.15,26.67
AGND6  (via drill 0.35)
  Top 0.508: IN6.10 v35.43,66.49 36.31,67 36.31,69.71 R14.1 | OUT6.1 v35.43,73.56
  Bottom 0.508: v35.43,73.56 v35.43,66.49
  pour Top: 21.15,56 40.83,56 40.83,82.67 21.15,82.67
  pour Bottom: 21.15,56 40.83,56 40.83,82.67 21.15,82.67
AGND7  (via drill 0.35)
  Top 0.508: IN7.10 v35.43,38.49 36.31,39 36.31,41.71 R16.1 | OUT7.1 v35.43,45.56
  Bottom 0.508: v35.43,45.56 v35.43,38.49
  pour Top: 21.15,28 40.83,28 40.83,54.67 21.15,54.67
  pour Bottom: 21.15,28 40.83,28 40.83,54.67 21.15,54.67
AGND8  (via drill 0.35)
  Top 0.508: IN8.10 v35.43,10.49 36.31,11 36.31,13.71 R18.1 | OUT8.1 v35.43,17.56
  Bottom 0.508: v35.43,17.56 v35.43,10.49
  pour Top: 21.15,0 40.83,0 40.83,26.67 21.15,26.67
  pour Bottom: 21.15,0 40.83,0 40.83,26.67 21.15,26.67
AGND9  (via drill 0.35)
  Top 0.508: IN9.10 v14.43,66.49 15.31,67 15.31,69.71 R20.1 | OUT9.1 v14.43,73.56
  Bottom 0.508: v14.43,73.56 v14.43,66.49
  pour Top: 0.15,56 19.83,56 19.83,82.67 0.15,82.67
  pour Bottom: 0.15,56 19.83,56 19.83,82.67 0.15,82.67
AGND10  (via drill 0.35)
  Top 0.508: IN10.10 v14.43,38.49 15.31,39 15.31,41.71 R22.1 | OUT10.1 v14.43,45.56
  Bottom 0.508: v14.43,45.56 v14.43,38.49
  pour Top: 0.15,28 19.83,28 19.83,54.67 0.15,54.67
  pour Bottom: 0.15,28 19.83,28 19.83,54.67 0.15,54.67
AGND11  (via drill 0.35)
  Top 0.508: IN11.10 v14.43,10.49 15.31,11 15.31,13.71 R24.1 | OUT11.1 v14.43,17.56
  Bottom 0.508: v14.43,17.56 v14.43,10.49
  pour Top: 0.15,0 19.83,0 19.83,26.67 0.15,26.67
  pour Bottom: 0.15,0 19.83,0 19.83,26.67 0.15,26.67